# EAGLE board WeBench1 (EAGLE 6.4)
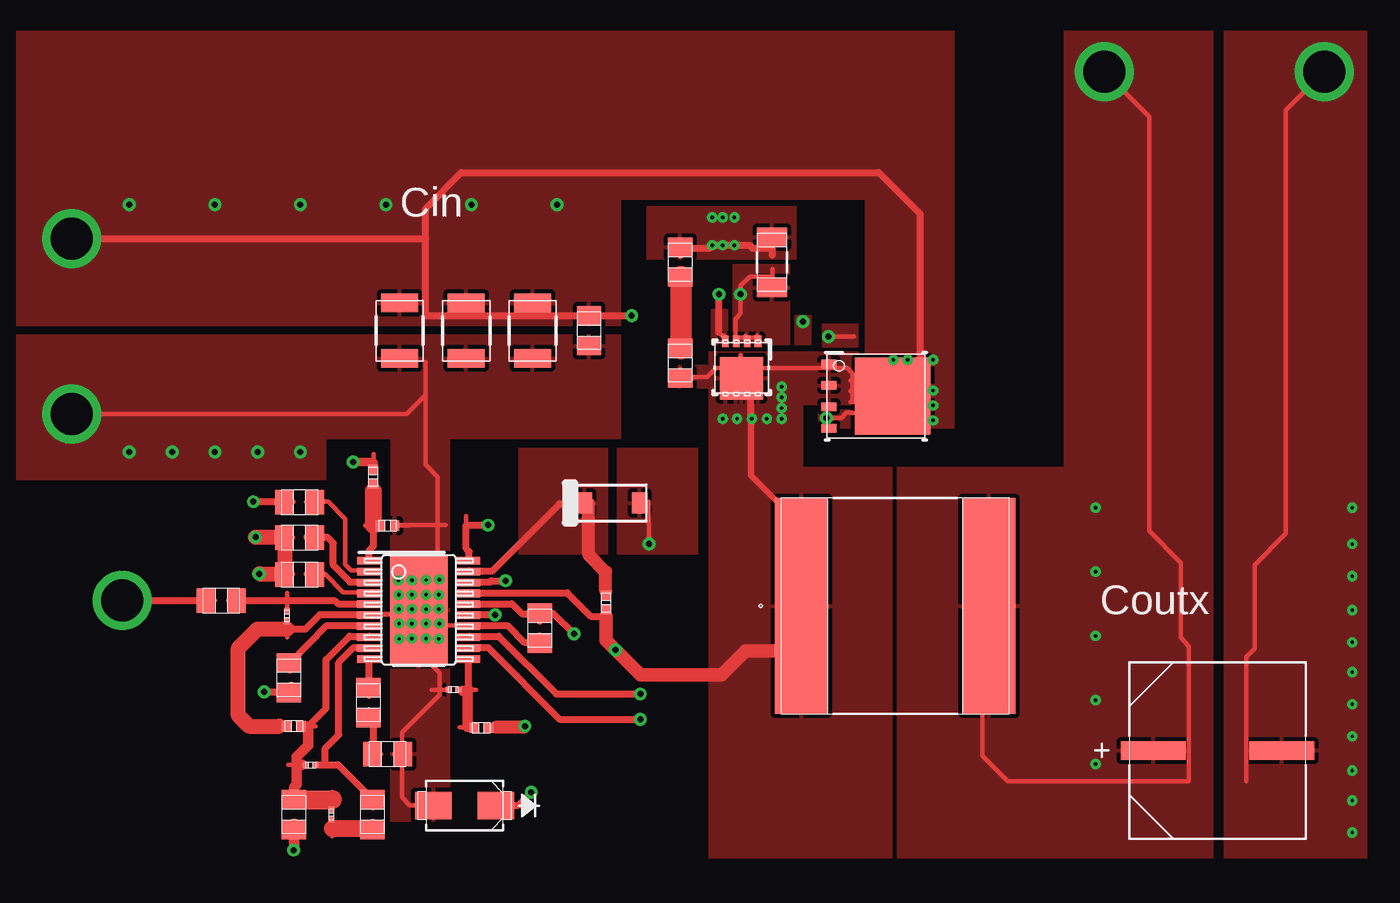
[diagram p0: board, top side]
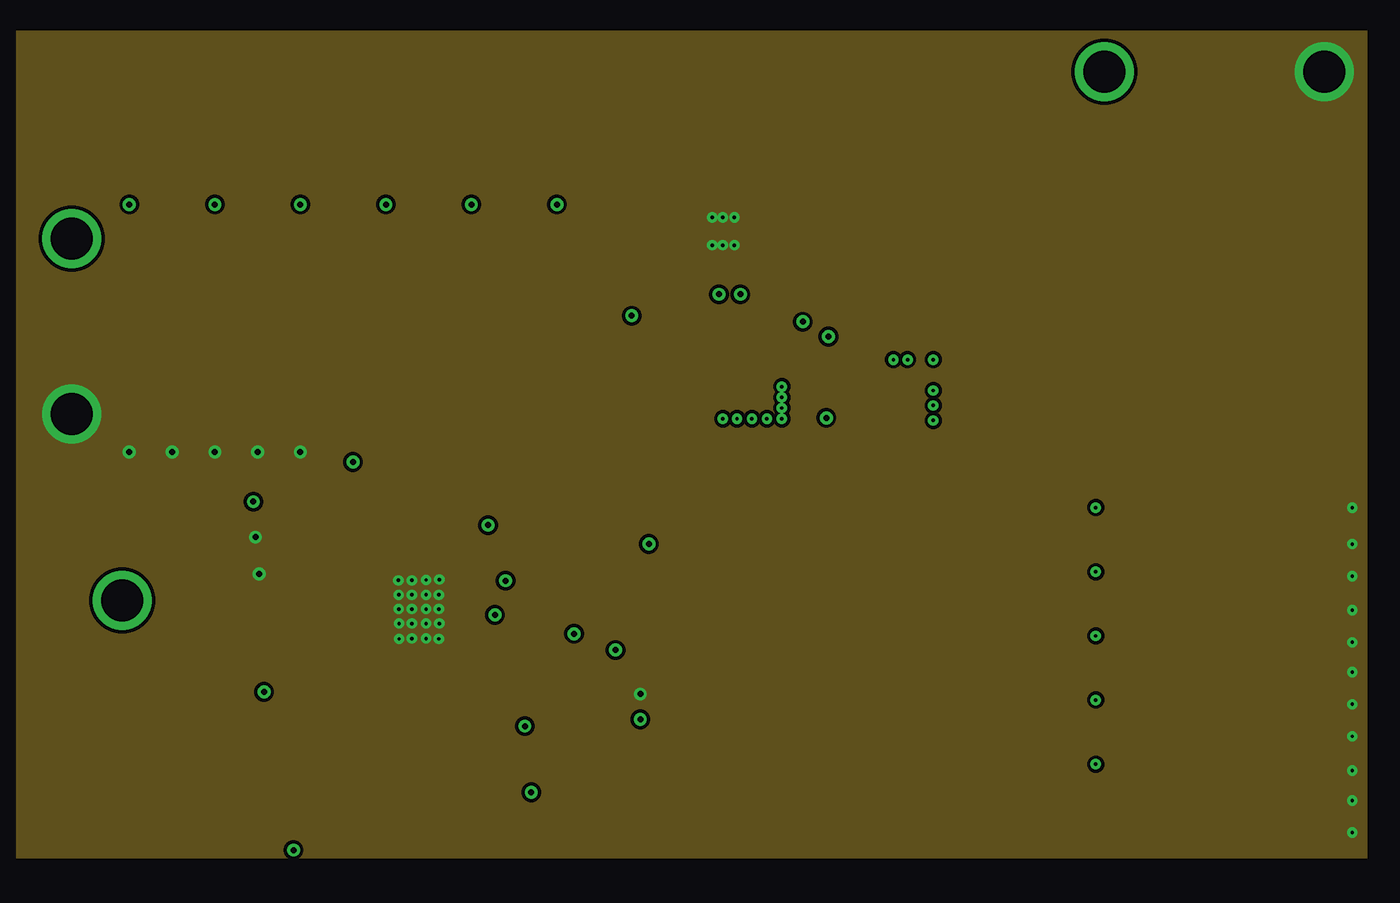
[diagram p1: board, inner layer INTERNAL1]
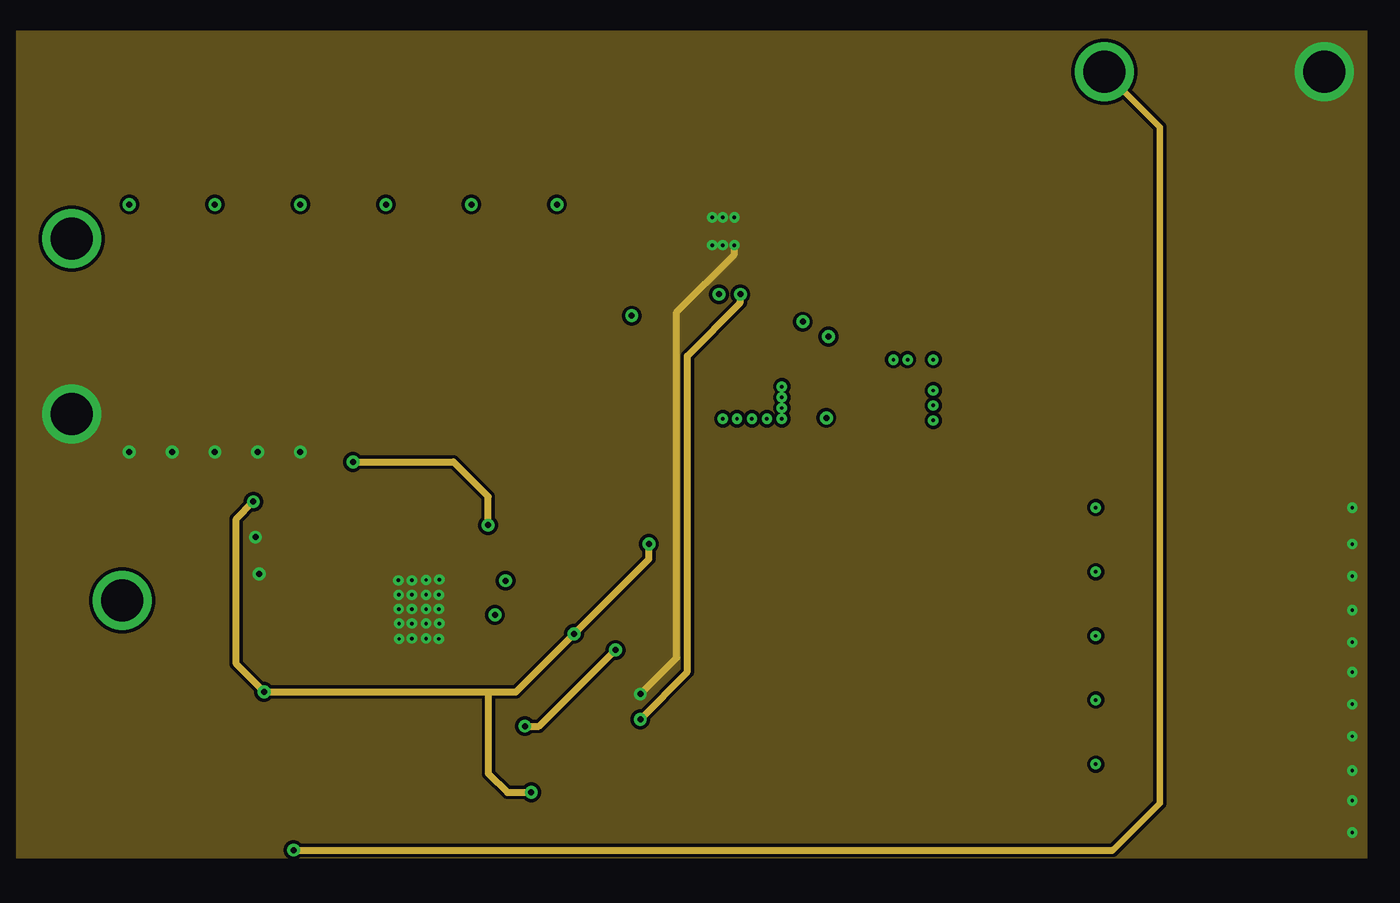
[diagram p2: board, inner layer INTERNAL2]
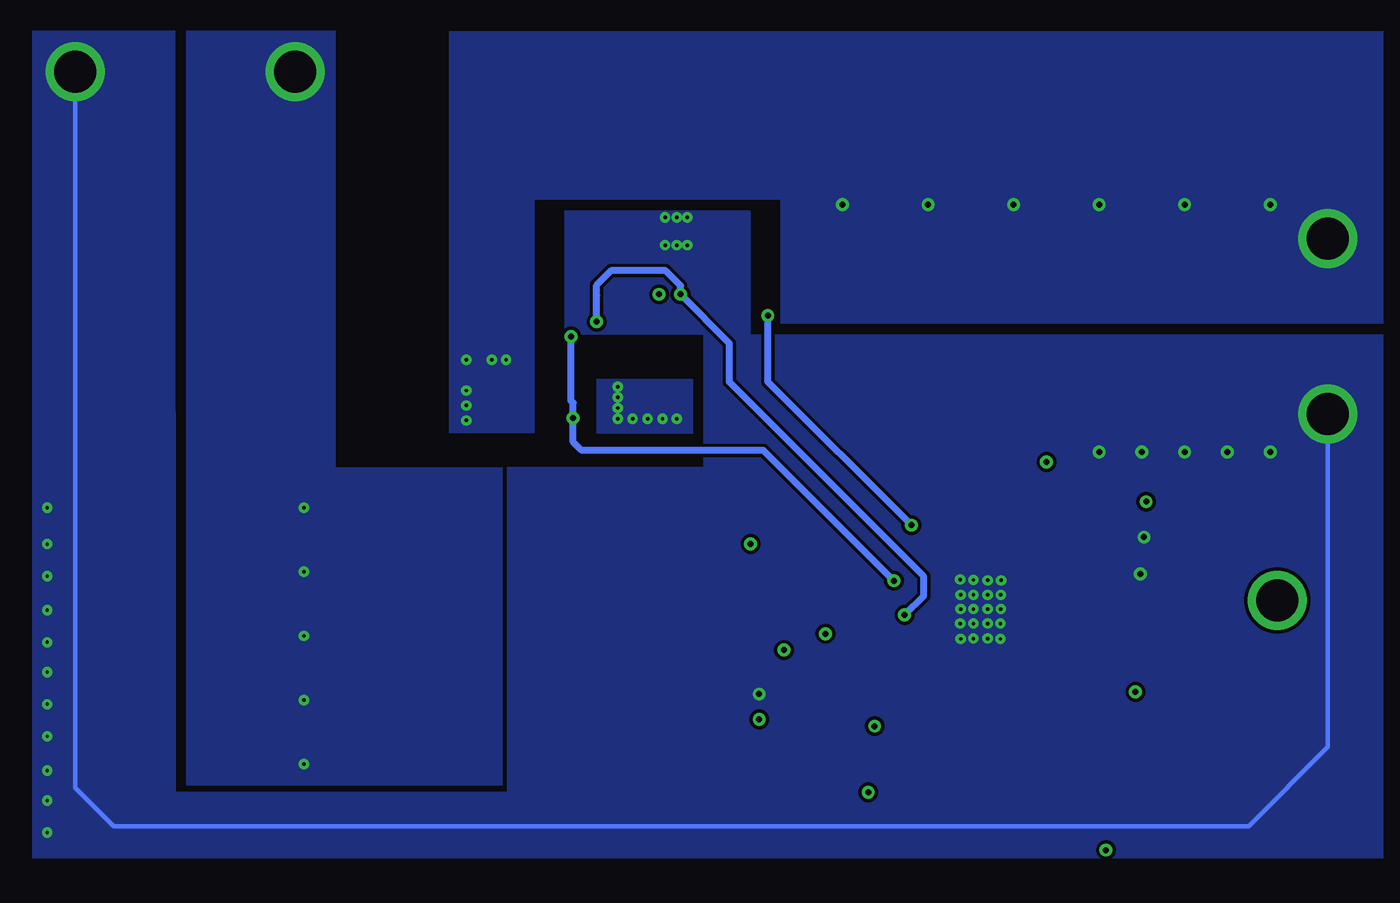
[diagram p3: board, bottom side, seen from below]

No outline drawn. Coordinates in mm, seen from the top.
Copper layers ((1*2)+(15*16)): TOP / INTERNAL1 / layer 15 / BOTTOM

## Footprints (pad centres in the part's own frame; a part is rotated, then mirrored left to right if it is on the bottom)
0402 = smd 0.559 x 0.61: 1 -0.419,0; 2 0.419,0
0805 = smd 1.118 x 1.448: 1 -0.902,0; 2 0.902,0
0201 = smd 0.356 x 0.33: 1 -0.292,0; 2 0.292,0
1210_280 = smd 1.1 x 2.2: 1 -1.65,0; 2 1.65,0
CAPSMT_62_F12 = smd 3.861 x 1.092: 1 -3.823,0; 2 3.823,0
SOD-123 = smd 0.915 x 1.22: 1 -1.637,0; 2 1.637,0
SMA = smd 2.184 x 1.626: 1 -1.854,0; 2 1.854,0
TP-1502 = drill 0.813 round: 1 0,0
XAL1580 = smd 3.15 x 12.827: 1 -5.575,0; 2 5.575,0
DQJ0008A = smd 0.91 x 0.51: 1 -2.795,1.905; 2 -2.795,0.635; 3 -2.795,-0.635; 4 -2.795,-1.905; 5 2.795,-1.905; 6 2.795,-0.635; 7 2.795,0.635; 8 2.795,1.905 | smd 4.49 x 4.57: 9 1.005,0
DNH0008A = smd 0.7 x 0.4: 1 -1.55,0.975; 2 -1.55,0.325; 3 -1.55,-0.325; 4 -1.55,-0.975; 5 1.55,-0.975; 6 1.55,-0.325; 7 1.55,0.325; 8 1.55,0.975 | smd 2.51 x 2.55: 9 0.645,0
1206 = smd 1.118 x 1.803: 1 -1.499,0; 2 1.499,0
PWP0020A = smd 1.4 x 0.45: 1 -2.95,2.925; 2 -2.95,2.275; 3 -2.95,1.625; 4 -2.95,0.975; 5 -2.95,0.325; 6 -2.95,-0.325; 7 -2.95,-0.975; 8 -2.95,-1.625; 9 -2.95,-2.275; 10 -2.95,-2.925; 11 2.95,-2.925; 12 2.95,-2.275; 13 2.95,-1.625; 14 2.95,-0.975; 15 2.95,-0.325; 16 2.95,0.325; 17 2.95,0.975; 18 2.95,1.625; 19 2.95,2.275; 20 2.95,2.925 | smd 3.4 x 6.5: 21 0,0

## Placement (x,y rotation side)
Cboot  [0402]  61.09,40.97 270 top
Ccm  [0805]  48.11,31.98 0 top
Ccomp1  [0805]  47.19,28.37 270 top
Ccomp2  [0201]  43.54,31.32 180 top
Cin_1  [1210_280]  56.72,57.12 270 top
Cin_2  [1210_280]  52.78,57.12 270 top
Cin_3  [1210_280]  48.82,57.12 270 top
Cinx  [0805]  60.07,57.12 270 top
Cout  [CAPSMT_62_F12]  97.41,32.18 0 top
Cramp  [0201]  52.02,35.79 180 top
Cres  [0805]  42.88,44.83 180 top
Csnub  [0805]  65.48,55.19 270 top
Css  [0805]  42.88,42.62 180 top
Csync  [0805]  38.23,41.07 0 top
Cvcc  [0805]  57.15,39.45 270 top
D1  [SOD-123]  61.44,46.89 0 top
D2  [SMA]  52.68,28.91 180 top
GND  [TP-1502]  103.73,72.47 0 top
GND1  [TP-1502]  29.34,52.12 0 top
L1  [XAL1580]  78.26,40.77 0 top
M1  [DQJ0008A]  77.11,53.24 0 top
M2  [DNH0008A]  69.14,54.94 270 top
Rcm  [0805]  46.96,35.03 90 top
Rcomp  [0201]  44.78,28.37 90 top
RDemb  [0805]  42.88,46.94 0 top
Rfb1  [0402]  42.55,33.63 180 top
Rfb2  [0805]  42.55,28.37 90 top
Rramp  [0402]  53.67,33.53 180 top
Rsense  [1206]  70.94,61.19 90 top
Rsnub  [0805]  65.48,61.19 270 top
Rt  [0201]  42.14,40.18 270 top
Ruv1  [0402]  48.11,45.54 0 top
Ruv2  [0402]  47.24,48.44 270 top
Rvccdis  [0805]  42.24,36.5 90 top
U1  [PWP0020A]  49.96,40.54 0 top
VIN  [TP-1502]  29.34,62.53 0 top
VOUT  [TP-1502]  90.63,72.47 0 top
VSync  [TP-1502]  32.31,41.07 0 top

## Library data of the parts
Cboot = ultra-librarian; RefDes: Cboot; Type: GRM155R71A104KA01D
Ccm = ultra-librarian; RefDes: Ccm; Type: CC0805KRX7R9BB222
Ccomp1 = ultra-librarian; RefDes: Ccomp1; Type: CL21C122JBFNNNE
Ccomp2 = ultra-librarian; RefDes: Ccomp2; Type: CGA1A2C0G1E820J030BA
Cin_1-Cin_3 = ultra-librarian
Cinx = ultra-librarian; RefDes: Cinx; Type: C0805C104M5RACTU
Cout = ultra-librarian; RefDes: Cout; Type: 35SVPF120M
Cramp = ultra-librarian; RefDes: Cramp; Type: GRM033R71E821KA01D
Cres = ultra-librarian; RefDes: Cres; Type: TMK212BJ474KD-T
Csnub = ultra-librarian; RefDes: Csnub; Type: CC0805KRX7R9BB153
Css = ultra-librarian; RefDes: Css; Type: CGA4F2C0G1H153J085AA
Csync = ultra-librarian; RefDes: Csync; Type: CC0805KRX7R9BB153
Cvcc = ultra-librarian; RefDes: Cvcc; Type: TMK212BJ474KD-T
D1 = ultra-librarian; RefDes: D1; Type: CDBW46-G
D2 = ultra-librarian; RefDes: D2; Type: B130L-13-F
GND = ultra-librarian; RefDes: GND; Type: TP-1502
GND1 = ultra-librarian; RefDes: GND1; Type: TP-1502
L1 = ultra-librarian; RefDes: L1; Type: XAL1580-532MEB
M1 = ultra-librarian; RefDes: M1; Type: CSD18533Q5A
M2 = ultra-librarian; RefDes: M2; Type: CSD18543Q3A
Rcm = ultra-librarian; RefDes: Rcm; Type: ERJ-6ENF3012V
Rcomp = ultra-librarian; RefDes: Rcomp; Type: RC0201FR-0728K7L
RDemb = ultra-librarian; RefDes: RDemb; Type: ERJ-6ENF3012V
Rfb1 = ultra-librarian; RefDes: Rfb1; Type: CRCW04021K15FKED
Rfb2 = ultra-librarian; RefDes: Rfb2; Type: RT0805BRD0730K5L
Rramp = ultra-librarian; RefDes: Rramp; Type: CRCW0402215KFKED
Rsense = ultra-librarian; RefDes: Rsense; Type: CSNL1206FT3L00
Rsnub = ultra-librarian; RefDes: Rsnub; Type: ERJ-6ENF3012V
Rt = ultra-librarian; RefDes: Rt; Type: RC0201FR-0712K1L
Ruv1 = ultra-librarian; RefDes: Ruv1; Type: CRCW04022K67FKED
Ruv2 = ultra-librarian; RefDes: Ruv2; Type: CRCW040254K9FKED
Rvccdis = ultra-librarian; RefDes: Rvccdis; Type: ERJ-6ENF3012V
U1 = ultra-librarian; RefDes: U1; Type: LM5117PMHX/NOPB
VIN = ultra-librarian; RefDes: VIN; Type: TP-1502
VOUT = ultra-librarian; RefDes: VOUT; Type: TP-1502
VSync = ultra-librarian; RefDes: VSync; Type: TP-1502

## Nets
0: Ccm.2 Cin_1.2 Cin_2.2 Cin_3.2 Cinx.2 Cout.2 Cramp.2 Cres.2 Css.2 Cvcc.2 D2.2 GND1.1 GND.1 Rfb1.2 Rsense.2 Rsnub.1 Rt.2 Ruv1.2 U1.6 U1.13 U1.14 U1.21
1: Cvcc.1 D1.2 D2.1 RDemb.1 RDemb.2 Rvccdis.1 U1.2 U1.16
2: Ccomp2.2 Rcomp.2 Rfb1.1 Rfb2.2 U1.8
3: Cboot.2 Csnub.2 L1.1 M1.1 M1.2 M1.3 M2.5 M2.6 M2.7 M2.8 M2.9 Rramp.1 U1.17
4: Cboot.1 D1.1 U1.19
5: Cin_1.1 Cin_2.1 Cin_3.1 Cinx.1 M1.5 M1.6 M1.7 M1.8 M1.9 Ruv2.1 U1.20 VIN.1
6: Cramp.1 Rramp.2 U1.11
7: M2.1 M2.2 M2.3 Rsense.1 U1.12
8: Cout.1 L1.2 Rfb2.1 VOUT.1
9: Csync.2 Rt.1 U1.5
10: Ruv1.1 Ruv2.2 U1.1
11: Ccomp1.1 Ccomp2.1 U1.9
12: Cres.1 U1.3
13: Css.1 U1.4
15: Ccomp1.2 Rcomp.1
16: M2.4 U1.15
17: Csync.1 VSync.1
18: Csnub.1 Rsnub.2
20: Rvccdis.2 U1.7
27: Rcm.2 U1.10
35: Ccm.1 Rcm.1
S$22netdata: M1.4 U1.18

## Tracks (layer width: path | path; a pad name or v marks a point on that pad's centre or on a via)
0  (via drill 0.2 pad 0.61, 0.36 pad 0.76, 2.49 pad 3.48)
  TOP 0.254: 51.08,45.57 51.56,45.57 | 51.21,35.79 51.69,35.79 | 51.21,35.79 51.21,36.8 49.99,38.02 49.99,40.59 | 48.51,31.98 48.97,31.98 | 52.96,39.6 50.95,39.6 50.8,39.75 50.8,40.59 49.99,40.59 | 51.08,45.57 51.08,43.74 49.99,42.65 49.99,40.59 | 48.51,45.57 51.08,45.57 | 47.02,40.26 48.39,40.26 48.72,40.59 49.99,40.59 | 51.08,45.57 51.08,48.44 50.37,49.17 50.37,53.31 | 51.21,35.79 51.21,35.48 48.97,33.25 48.97,31.98 | 50.7,28.93 49.43,28.93 48.97,29.39 48.97,31.98 | v29.34,52.17 49.23,52.17 50.37,53.31 | 50.37,53.31 50.37,55.27 | v103.76,72.52 101.47,70.23 101.47,45.09 99.62,43.2 99.62,40.89 99.62,38.25 99.11,37.74 99.11,30.35 | 49.86,28.91 51.49,28.91 | 70.98,61.54 70.98,62.48 | 65.52,61.54 65.52,62.48 | 51.07,44.98 51.07,46.13 | 48.49,31.97 49.43,31.97 | 41.2,33.62 42.14,33.62 | 57.14,38.12 57.14,39.06 | 41.55,44.84 42.49,44.84 | 41.55,42.66 42.49,42.66 | 42.15,38.91 42.15,39.85 | 48.49,45.55 49.43,45.55 | 50.72,35.78 51.66,35.78
  TOP 0.406: 70.97,61.59 70.97,62.03 69.77,62.03 69.62,62.2 v68.71,62.2 v68.02,62.2 v67.39,62.2 67.21,62.03 65.53,62.03 65.53,61.59 | 52.96,39.6 55.22,39.6 56.21,38.61 57.15,38.61 | 47.02,40.26 44.09,40.26 43.23,39.4 42.16,39.4 | v63.12,35.53 58.14,35.53 54.71,38.96 52.96,38.96
  TOP 0.889: 42.16,39.4 40.39,39.4 39.24,38.25 39.24,34.27 39.88,33.63 41.68,33.63 | v40.49,42.67 42.04,42.67 42.04,44.86 v40.26,44.86
  INTERNAL2 0.406: v63.12,35.53 65.28,37.69 65.28,58.22 68.71,61.65 v68.71,62.2
  BOTTOM 0.254: v103.76,72.52 103.76,29.97 101.47,27.69 34.04,27.69 29.34,32.38 v29.34,52.17
  other vias: 105.41,30.99 105.41,34.92 105.41,38.61 105.41,42.55 105.41,46.61 105.41,29.21 105.41,27.3 105.41,44.45 105.41,40.51 105.41,36.83 105.41,33.02 42.93,49.91 40.39,49.91 37.85,49.91 35.31,49.91 32.77,49.91 51.18,39.73 48.79,39.73 50.39,39.73 49.56,39.73 67.39,63.86 68.02,63.86 68.71,63.86 48.79,38.81 49.56,38.84 50.39,38.84 51.16,38.81 49.56,42.29 48.74,42.29 50.39,42.32 51.18,42.34 51.16,41.43 50.39,41.43 49.56,41.43 48.77,41.43 50.39,40.59 49.56,40.59 48.77,40.59 51.16,40.59
  pour TOP (rank 6): 97.79,74.93 106.3,74.93 106.3,25.78 97.79,25.78
  pour TOP (rank 6): 63.5,64.52 72.39,64.52 72.39,61.34 63.5,61.34
  pour TOP: 51.82,27.94 48.26,27.94 48.26,40.11 46.1,40.11 46.1,40.44 48.26,40.44 48.29,50.67 44.45,50.67 44.45,48.26 26.04,48.26 26.04,56.9 61.98,56.9 61.98,50.67 51.82,50.67
  pour BOTTOM (rank 6): 26.04,56.9 63.63,56.9 63.63,64.26 74.68,64.26 74.68,56.9 66.42,56.9 66.42,49.02 78.11,49.02 78.11,29.72 97.79,29.72 97.82,74.93 106.3,74.93 106.3,25.78 26.04,25.78
  pour INTERNAL1 (rank 5): 26.04,74.93 106.3,74.93 106.3,25.78 26.04,25.78
  pour INTERNAL2 (rank 5): 26.04,74.93 26.04,25.78 106.3,25.78 106.3,74.93
1  (via drill 0.36 pad 0.76)
  TOP 0.254: v63.63,44.45 63.63,45.67 63.6,45.72 63.6,46.99 | 43.31,46.97 43.76,46.97 44.58,46.97 45.59,45.95 45.59,43.23 45.95,42.88 47.04,42.88 | 53.87,28.91 55.5,28.91 | 41.58,46.95 42.52,46.95 | 43.28,46.95 44.22,46.95 | 57.14,39.83 57.14,40.77 | 42.28,35.18 42.28,36.12
  TOP 0.406: 42.06,46.97 42.42,46.97 | 42.06,46.97 | v40.13,46.97 42.06,46.97 | 57.15,39.88 57.15,40.31 | 42.42,36.07 42.42,35.81 42.29,35.66 v40.77,35.66 | v56.64,29.69 55.88,28.93 54.69,28.93 | v40.77,35.66 | v59.18,39.12 57.96,40.31 57.15,40.31 | 57.15,40.31 56.08,40.31 55.5,40.89 52.96,40.89
  INTERNAL2 0.406: v63.63,44.45 63.63,43.56 v59.18,39.12 55.73,35.66 54.1,35.66 | 54.1,35.66 v40.77,35.66 39.12,37.31 39.12,45.95 v40.13,46.97 | 54.1,35.66 54.1,30.81 55.22,29.69 v56.64,29.69
  pour TOP (rank 3): 61.72,50.16 61.72,43.81 66.55,43.81 66.55,50.16
2
  TOP 0.254: 42.53,28.78 42.53,29.72 | 42.9,33.62 43.84,33.62 | 42.22,31.33 43.16,31.33 | 44.82,28.78 44.82,29.72
  TOP 0.406: 43.38,33.63 44.45,34.67 44.45,37.57 45.85,38.96 47.02,38.96
  TOP 0.635: 42.7,31.34 42.7,30.18 42.55,30 Rfb2.2 | 42.7,31.34 42.7,31.8 43.38,32.49 43.38,33.63 | 42.7,31.34 43.03,31.34
  TOP 1.143: Rfb2.2 44.83,29.26
3  (via drill 0.2 pad 0.61, 0.36 pad 0.76)
  TOP 0.254: 69.7,53.19 70.05,53.52 70.05,53.7 69.39,53.7 68.76,53.7 | 75.72,52.88 75.72,53.54 | 75.72,53.54 | 75.72,53.54 75.72,54.18 75.72,54.59 75.41,54.89 69.06,54.89 | 69.06,54.89 68.76,54.56 68.76,53.7 | 68.1,53.7 68.76,53.7 | 69.06,54.89 67.61,54.89 67.08,54.38 65.53,54.38 | 69.7,51.84 v69.75,51.89 | 75.59,52.87 75.84,52.87 | 75.59,53.53 75.84,53.53 | 75.59,54.17 75.84,54.17 | 69.06,54.08 69.06,55.68 | 70.04,53.67 70.04,53.72 | 69.38,53.67 69.38,53.72 | 68.75,53.67 68.75,53.72 | 68.08,53.67 68.08,53.72 | 54.08,33.57 55.02,33.57 | 65.52,53.9 65.52,54.84 | 61.07,39.67 61.07,40.62
  TOP 0.381: 69.7,51.84 69.7,51.08 69.7,48.51 73.03,45.19 73.03,38.1
  TOP 0.406: 69.7,51.89 69.7,53.19 | 61.09,40.16 60.17,40.16 58.78,41.55 52.96,41.55
  TOP 0.762: v56.26,33.63 56.21,33.58 54.56,33.58
  TOP 0.813: 61.09,40.16 61.09,38.71 63.12,36.68 67.94,36.68 69.37,38.1 73.03,38.1
  INTERNAL2 0.406: v56.26,33.63 57.1,33.63 v61.65,38.15
  other vias: 68.02,51.89 71.53,51.89 71.53,53.16 71.53,53.8 70.64,51.89 68.86,51.89 71.53,52.53
  pour TOP (rank 2): 76.07,55.88 76.07,52.7 72.77,52.7 72.77,49.02 78.11,49.02 78.11,25.78 67.18,25.78 67.18,53.7 64.77,53.7 64.77,55.09 67.18,55.09 67.18,55.88
  pour BOTTOM: 67.06,54.25 67.06,51 72.77,51 72.77,54.25
4
  TOP 0.254: 61.07,41.38 61.07,42.32
  TOP 0.406: 60.05,46.84 58.32,46.84 54.33,42.85 52.96,42.85
  TOP 0.762: 60.05,46.84 60.05,43.81 61.06,42.8 61.06,41.66
  pour TOP (rank 5): 61.21,50.16 61.21,43.81 55.88,43.81 55.88,49.53 55.88,50.16
5  (via drill 0.2 pad 0.61, 0.36 pad 0.76, 2.49 pad 3.48)
  TOP 0.254: 79.76,55.35 78.59,54.18 78.59,53.54 | 75.72,52.25 75.36,52.25 75.06,51.94 v74.17,51.94 | 78.59,52.25 78.59,53.54 | 78.59,53.54 77.93,53.54 77.62,53.21 77.17,53.21 | v74.3,56.77 75.82,56.77 | 77.04,53.2 77.29,53.2 | 78.46,54.17 78.72,54.17 | 78.46,53.53 78.72,53.53 | 78.46,52.87 78.72,52.87 | 78.46,52.23 78.72,52.23 | 75.59,52.23 75.84,52.23 | 47.28,48.84 47.28,49.78 | 52.77,44.98 52.77,46.13
  TOP 0.406: 79.76,55.35 79.76,64.06 77.29,66.52 52.48,66.52 50.37,64.39 50.37,62.59 | 52.96,42.19 54.2,42.19 54.25,42.27 v55.12,42.27 | 52.96,43.51 52.96,43.99 52.78,44.17 52.78,45.57 v54.08,45.57 | v29.34,62.59 50.37,62.59 | 50.37,62.59 50.37,58.01 v62.61,58.01
  TOP 0.508: 47.27,49.02 47.27,49.3 | v46.05,49.33 47.24,49.33
  INTERNAL2 0.406: v46.05,49.33 52.02,49.33 54.08,47.27 v54.08,45.57
  BOTTOM 0.406: v74.3,56.77 74.3,52.96 74.17,52.83 v74.17,51.94 74.17,50.52 73.66,50.01 62.87,50.01 v55.12,42.27 | v54.08,45.57 62.61,54.08 v62.61,58.01
  other vias: 58.17,64.62 53.09,64.62 48.01,64.62 42.93,64.62 37.85,64.62 32.77,64.62 78.16,55.4 80.52,55.4 80.52,53.57 80.52,52.68 80.52,51.79 78.99,55.4
  pour TOP (rank 3): 26.04,74.93 81.79,74.93 81.79,51.31 76.45,51.31 76.45,64.9 61.98,64.9 61.98,57.4 26.04,57.4
  pour TOP (rank 3): 76.07,52.45 73.66,52.45 73.66,51.31 76.07,51.31
  pour TOP (rank 4): 76.07,56.13 76.07,57.53 73.91,57.53 73.91,56.13
  pour BOTTOM: 76.45,51.05 81.53,51.05 81.53,74.9 26.04,74.93 26.04,57.53 61.85,57.53 61.85,64.9 76.45,64.9
6
  TOP 0.254: 52.38,33.57 53.31,33.57 | 52.43,35.78 53.37,35.78
  TOP 0.406: 52.91,35.79 52.91,37.59 52.96,37.64
  TOP 0.635: 52.58,35.74 52.86,35.74 | 52.86,35.74 52.91,35.79 | 52.86,35.74 52.86,33.58 53.09,33.58
7  (via drill 0.36 pad 0.76)
  TOP 0.254: 70.97,60.33 69.62,60.33 69.06,59.79 v69.06,59.28 69.06,58.14 68.76,57.81 68.76,56.72 69.39,56.72 70.05,56.72 | 68.75,56.54 68.75,56.84 | 69.38,56.54 69.38,56.84 | 70.04,56.54 70.04,56.84 | 70.98,59.84 70.98,60.78
  TOP 0.406: v63.12,34.04 58.32,34.04 54.08,38.3 52.96,38.3
  INTERNAL2 0.406: v63.12,34.04 65.91,36.85 65.91,55.63 69.06,58.8 v69.06,59.28
  pour TOP (rank 2): 68.58,56.26 72.01,56.26 72.01,61.09 68.58,61.09
8  (via drill 0.2 pad 0.61, 0.36 pad 0.76, 2.49 pad 3.48)
  TOP 0.254: v90.68,72.52 93.34,69.85 93.34,45.21 95.22,43.33 95.22,40.89 95.22,38.89 95.71,38.38 95.71,30.35 84.96,30.35 83.44,31.88 83.44,38.1 | 42.53,27.08 42.53,28.02
  TOP 0.635: 42.55,27.81 42.55,27.79 42.55,27.56 42.55,26.26
  INTERNAL2 0.381: 91.19,26.26 93.98,29.06 93.98,69.22 v90.68,72.52
  INTERNAL2 0.406: v42.52,26.26 91.19,26.26
  other vias: 90.17,46.61 90.17,42.8 90.17,31.37 90.17,35.18 90.17,38.99
  pour TOP (rank 2): 78.36,25.78 97.16,25.78 97.16,74.93 88.27,74.93 88.27,49.02 78.36,49.02
  pour BOTTOM: 78.36,30.1 97.16,30.1 97.16,74.93 88.27,74.93 88.27,49.02 78.36,49
9
  TOP 0.254: 38.63,41.08 39.57,41.08 | 42.15,40.62 42.15,41.55
  TOP 0.406: 39.12,41.1 42.14,41.1 42.16,41.1 44.96,41.1 45.16,40.89 47.02,40.89
10
  TOP 0.254: 47.28,47.14 47.28,48.08 | 46.79,45.55 47.73,45.55
  TOP 0.406: 47.02,43.51 47.02,44.07 47.27,44.32 47.27,45.57
  TOP 1.016: 47.27,45.57 47.27,47.6
11
  TOP 0.254: 43.92,31.33 44.86,31.33 | 47.23,28.78 47.23,29.72
  TOP 0.406: 47.24,28.83 47.24,29.26 45.16,31.34 44.4,31.34 | 43.94,31.34 44.4,31.34 | 44.4,31.34 44.4,32.31 45.21,33.12 45.21,37.41 46.1,38.3 47.02,38.3
12
  TOP 0.254: 47.02,42.22 47.04,42.22 | 43.26,44.84 44.2,44.84
  TOP 0.406: 43.31,44.86 43.74,44.86 44.53,44.86 44.88,44.5 44.88,43.2 45.87,42.19 47.02,42.19
13
  TOP 0.254: 43.23,42.67 | 43.23,42.67 43.74,42.67 44.4,42.67 45.47,41.58 47.04,41.58 | 43.26,42.66 44.2,42.66
15
  TOP 0.254: 47.23,27.08 47.23,28.02 | 44.82,27.08 44.82,28.02
  TOP 1.016: 44.83,27.56 47.24,27.56
16  (via drill 0.36 pad 0.76)
  TOP 0.254: 67.79,57.02 67.79,57 68.1,56.72 | 68.08,56.54 68.08,56.84
  TOP 0.406: 67.79,57.02 v67.79,59.28 | 52.96,40.26 54.43,40.26 v54.48,40.23
  BOTTOM 0.406: v72.77,57.66 72.77,59.23 72.77,59.82 71.93,60.68 68.68,60.68 67.79,59.79 v67.79,59.28 64.9,56.36 64.9,54.08 53.34,42.52 53.34,41.38 v54.48,40.23
  pour TOP (rank 4): 73.28,56.26 72.26,56.26 72.26,58.04 73.28,58.04
  pour TOP (rank 4): 68.33,56.26 68.33,58.42 67.31,58.42 67.31,56.26
17  (via drill 2.49 pad 3.48)
  TOP 0.254: 36.93,41.08 37.87,41.08
  TOP 0.406: 37.41,41.1 37.39,41.1 v32.33,41.1
18
  TOP 0.254: 65.52,59.84 65.52,60.78 | 65.52,55.6 65.52,56.54
  TOP 1.27: 65.53,56.06 65.53,60.33
20
  TOP 0.254: 42.28,36.88 42.28,37.82
  TOP 0.406: 42.29,36.96 42.29,37.36 44.5,39.6 47.02,39.6
27
  TOP 0.254: 47,35.38 47,36.32
  TOP 0.406: 46.99,35.48 47.02,35.48 47.02,35.87 47.02,37.64
35
  TOP 0.254: 47,33.68 47,34.62 | 46.79,31.97 47.73,31.97
  TOP 0.406: 46.99,34.54 47.02,34.52 47.02,34.16 47.27,33.91 47.27,31.98 47.62,31.98

## Text on the board
ASSYNOTES: Cin | Coutx